# Altium PCB BNO055 Host.PcbDoc
Units mil, origin at the board's own origin, x right, y up, seen from the top; angles counter-clockwise.
Board outline 600 x 600 mil, 4 copper layers (Top Layer, GND, VCC, Bottom Layer), stack 30.634 mil thick; 6 components, 7 nets, 19 pads, 8 vias.
Unrouted connection lines stored in the file: 3.
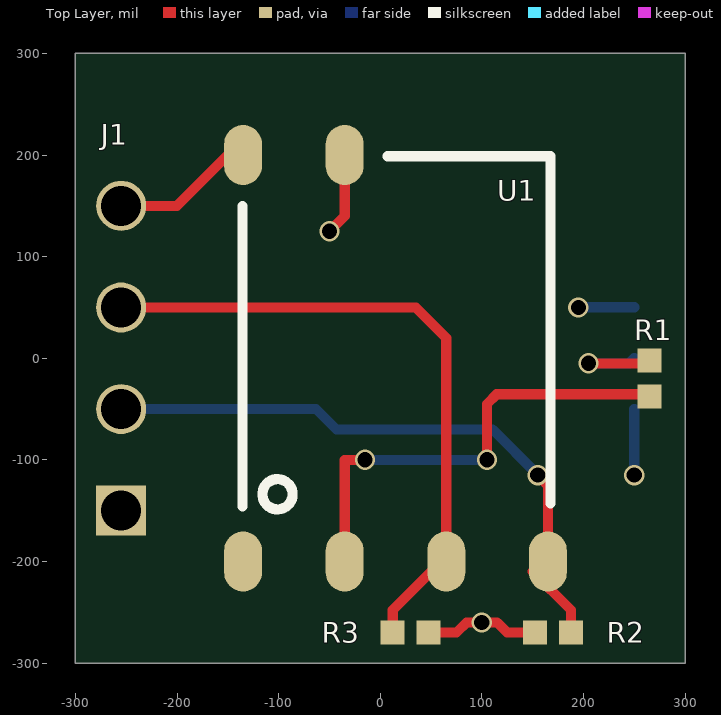
[diagram p0: Top Layer view]
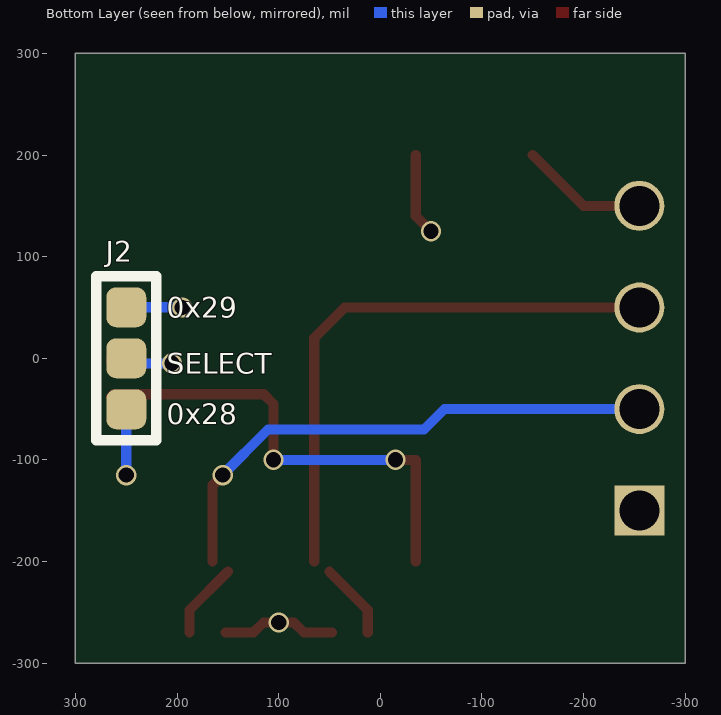
[diagram p1: Bottom Layer view, seen from below]
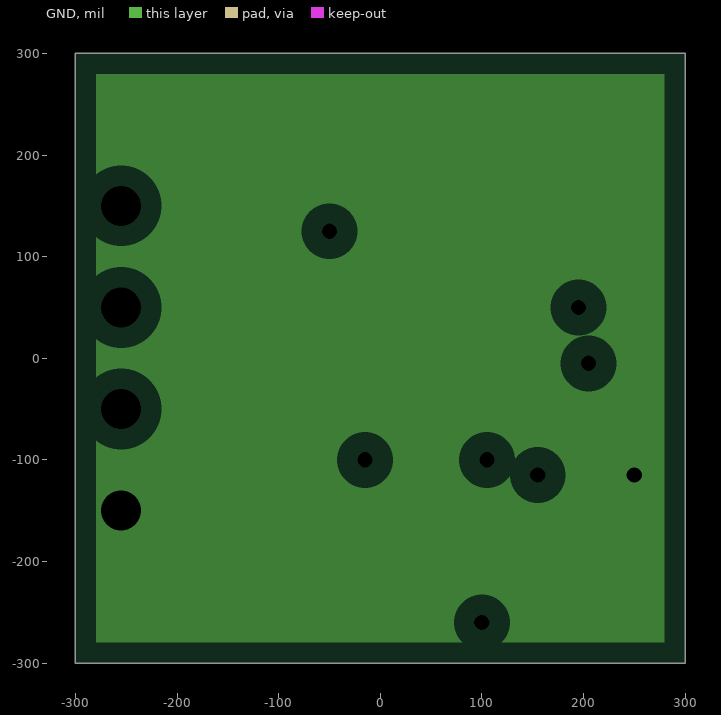
[diagram p2: GND, clearances drawn from the general rule]
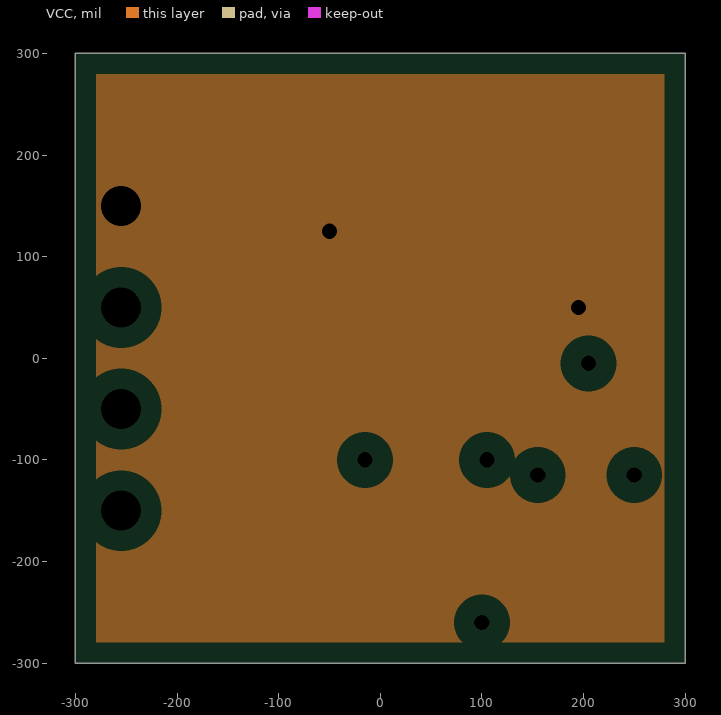
[diagram p3: VCC, clearances drawn from the general rule]

## Layer stack, top to bottom
Top Solder: solder mask 0.4, Solder Resist, Dk 3.5
Top Layer: signal copper 1.4
Dielectric 1: core 10, FR-4, Dk 4.2
GND: plane copper 1.417, net GND
Dielectric 3: prepreg 5, Dk 4.2
VCC: plane copper 1.417, net VCC
Dielectric 2: core 10, Dk 4.2
Bottom Layer: signal copper 1.4
Bottom Solder: solder mask 0.4, Solder Resist, Dk 3.5

## Board outline
-300,-300 -300,300 300,300 300,-300

## Design rules (kind name [scope] priority, off if disabled: settings)
Clearance [All] p1: gap=10
PlaneClearance [All] p1: clearance=20
PlaneConnect [All] p1: planeconnectstyle=Relief reliefexpansion=20 reliefentries=4 reliefconductorwidth=10 reliefairgap=10
PolygonConnect [All] p1: connectstyle=Relief reliefconductorwidth=10 reliefentries=4 polygonreliefangle="90 Angle" airgapwidth=10
RoomDefinition "BNO055 Host" [InComponentClass('BNO055 Host')] p1 off: confinementstyle=ConfineIn formatcopy=TRUE lockcomponents=FALSE outline 345,-240 1525,-240 1525,340 345,340
RoutingVias [All] p1: holewidth=15 width=20 viastyle="Through Hole" minholewidth=15 minwidth=10 maxholewidth=28 maxwidth=50
SolderMaskExpansion [All] p1: expansion=4
Width [All] p1: maxlimit=10 minlimit=10 preferedwidth=10
28 further rules are at their usual default settings.

## Components (designator, comment, footprint, x,y, rotation, side; value= is the part's Value field where it differs from the comment)
J1 "HEADER 4/SM" "61900411021 - flip" -255,-150 r90 top
J2 "Header 3H" SolderJumper 250,0 r270 bottom
R1 "10k" RESC402N 265,-20 r270 top
R2 "10k" RESC402N 170,-270 r0 top
R3 "10k" RESC402N 30,-270 r180 top
U1 "BNO055" BNO055 15,0 r90 top

## Footprints (in the part's own frame and the unit in brackets; to place one, negate y for a bottom-side part, rotate by r counter-clockwise, add the part's x,y. Pads: shape width x height; smd on the part's side, far side on the other; paste and mask are expansions set on the pad)
"61900411021 - flip" [mm] "4 Positions Header Connector 0.100\" (2.54mm) Through Hole, Right Angle Tin"
  rect 1.25x1.25 hole 1: 1(0,0)
  round 1.25 hole 1: 2(2.54,0) 3(5.08,0) 4(7.62,0)
  body extent -1.28,-0.32 8.88,13.2, height 5.9
BNO055 [mm] "PESKY PRODUCTS BNO-055 Nano Board"
  oval 1.5x0.95 smd: 1(-5.08,3.81) 2(-5.08,1.27) 3(-5.08,-1.27) 4(-5.08,-3.81) 5(5.08,1.27) 6(5.08,3.81)
  silkscreen extent -3.78,-3.88 5.05,3.83, body extent -5.23,-5.21 5.18,5.21, height 0.79
RESC402N [mm] "Chip Resistor, 2-Leads, Body 1.00x0.50mm, IPC Medium Density"
  rect 0.6x0.6 smd: 1(-0.45,0) 2(0.45,0)
  body extent -0.55,-0.3 0.55,0.3, height 0.4
SolderJumper [mm] "3 pos solder Jumper"
  rrect50% 1x1 smd: 1(-1.275,0) 2(0,0) 3(1.275,0)
  silkscreen extent -2.05,-0.75 2.05,0.75

## Part data
J2: "Header, 3-Pin, Right Angle"
R1 R2 R3: library part RC0402FR-0710KL, "RES SMD 10K OHM 1% 1/16W 0402"
U1: library part "BNO055 Nano", "PESKY PRODUCTS BNO-055 NANO BREAKOUT BOARD"

## Via types
v1: diameter 20, hole 15, Top Layer to Bottom Layer, tented both sides, 8 vias

## Nets (pads, with @x,y where several pads share a name; then routed paths per layer and width w, separated by ;. In a path a pad name is that pad's centre, name@x,y a point inside that pad or via, vN(x,y) a via of type N, cw(c..) or ccw(c..) an arc to the next point about the centre after c; other vN are vias at no path point)
3V3: R2.1 R3.1 | length 112.9
  Top Layer w10: R3.1 75,-270 85,-260 v1(100,-260) 115,-260 125,-270 R2.1
D0: J1.3 R2.2 U1.4 | length 581.9
  Top Layer w10: U1.4@150,-210 187.72,-247.72 R2.2 ; v1(155,-115) 165,-125 U1.4
  Bottom Layer w10: -235,-50 -63.28,-50 -43.09,-70.2 110.55,-70.2 155,-114.64 v1(155,-115)
D1: J1.2 R3.2 U1.3 | length 608
  Top Layer w10: -235,50 35,50 65,20 U1.3 ; R3.2 12.28,-247.72 U1.3@50,-210
GND: J1.1 J2.3 U1.6 | length 170.5
  Top Layer w10: -235,150 -200,150 U1.6@-150,200
  Bottom Layer w10: v1(250,-115) J2.3
NetJ2_2: J2.2 R1.1 | length 108.2
  Top Layer w10: v1(205,-5) 262.28,-5 R1.1
  Bottom Layer w10: v1(205,-5) 245,-5 J2.2
NetR1_2: R1.2 U1.2 | length 459.9
  Top Layer w10: U1.2 -35,-100 v1(-15,-100) ; v1(105,-100) 105,-45 114.57,-35.43 262.72,-35.43 R1.2
  Bottom Layer w10: v1(-15,-100) v1(105,-100)
VCC: J1.4 J2.1 U1.5 | length 136.3
  Top Layer w10: v1(-50,125) -35,140 U1.5
  Bottom Layer w10: v1(195,50) 195.2,50.2 J2.1
pads on no net: U1.1

## Polygon pours and split planes (outlines as drawn)
GND on GND (split plane): 279.9,-279.9 -279.9,-279.9 -279.9,279.9 279.9,279.9
VCC on VCC (split plane): 279.9,-279.9 -279.9,-279.9 -279.9,279.9 279.9,279.9

## Silkscreen, mask and mechanical layers (free items; w line width, h text height)
Bottom Overlay:
  text "0x29" at 210,40 h20
  text "SELECT" at 210,-15 h20
  text "0x28" at 210,-65 h20
Mechanical 1:
  lines w10: -320,-300 -320,-115 -320,115 -320,300 300,300 300,-300 -320,-300